# Altium PCB PCB1.PcbDoc
Units mil, origin at the board's own origin, x right, y up, seen from the top; angles counter-clockwise.
Board outline 750 x 510 mil, 2 copper layers (Top Layer, Bottom Layer); 9 components, 8 nets, 24 pads, 0 vias.
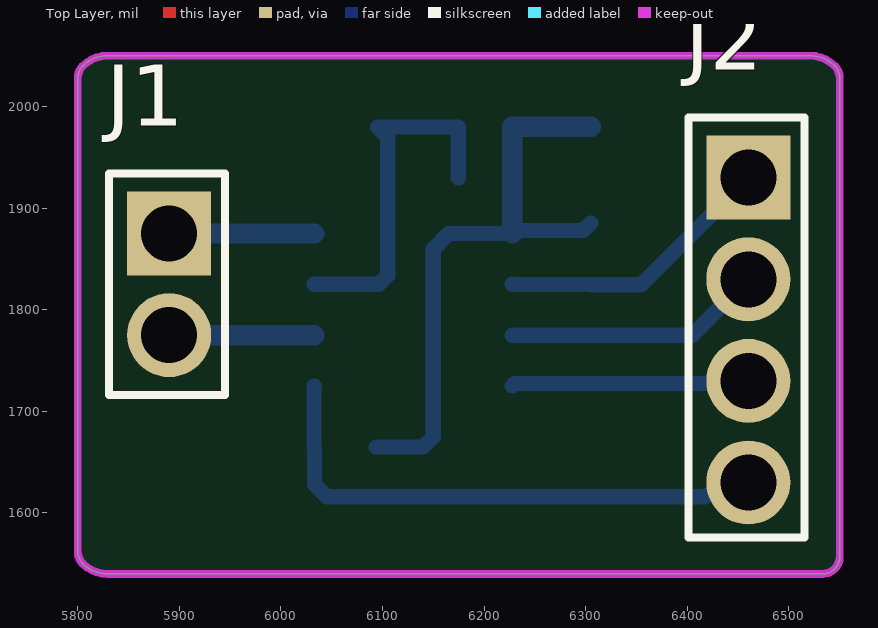
[diagram p0: Top Layer view]
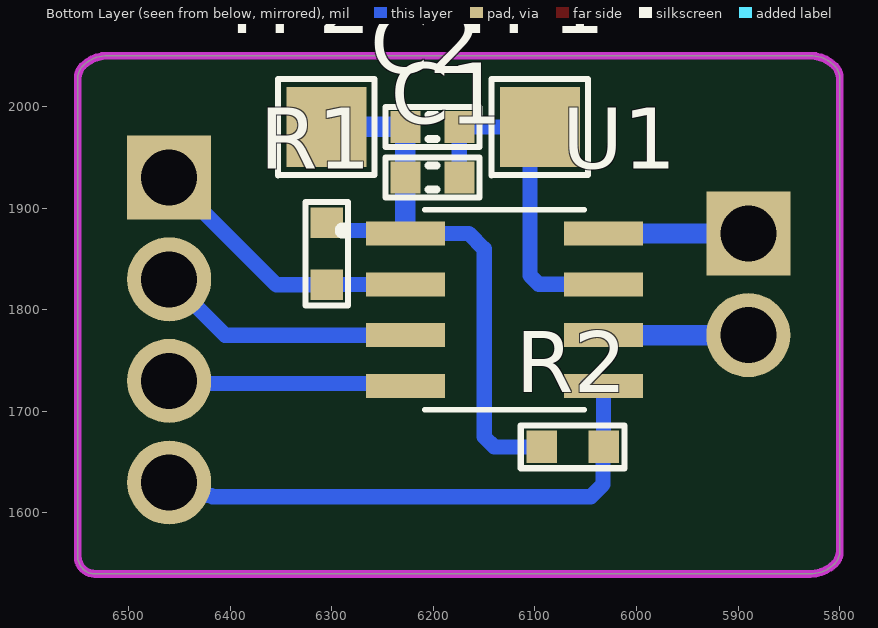
[diagram p1: Bottom Layer view, seen from below]
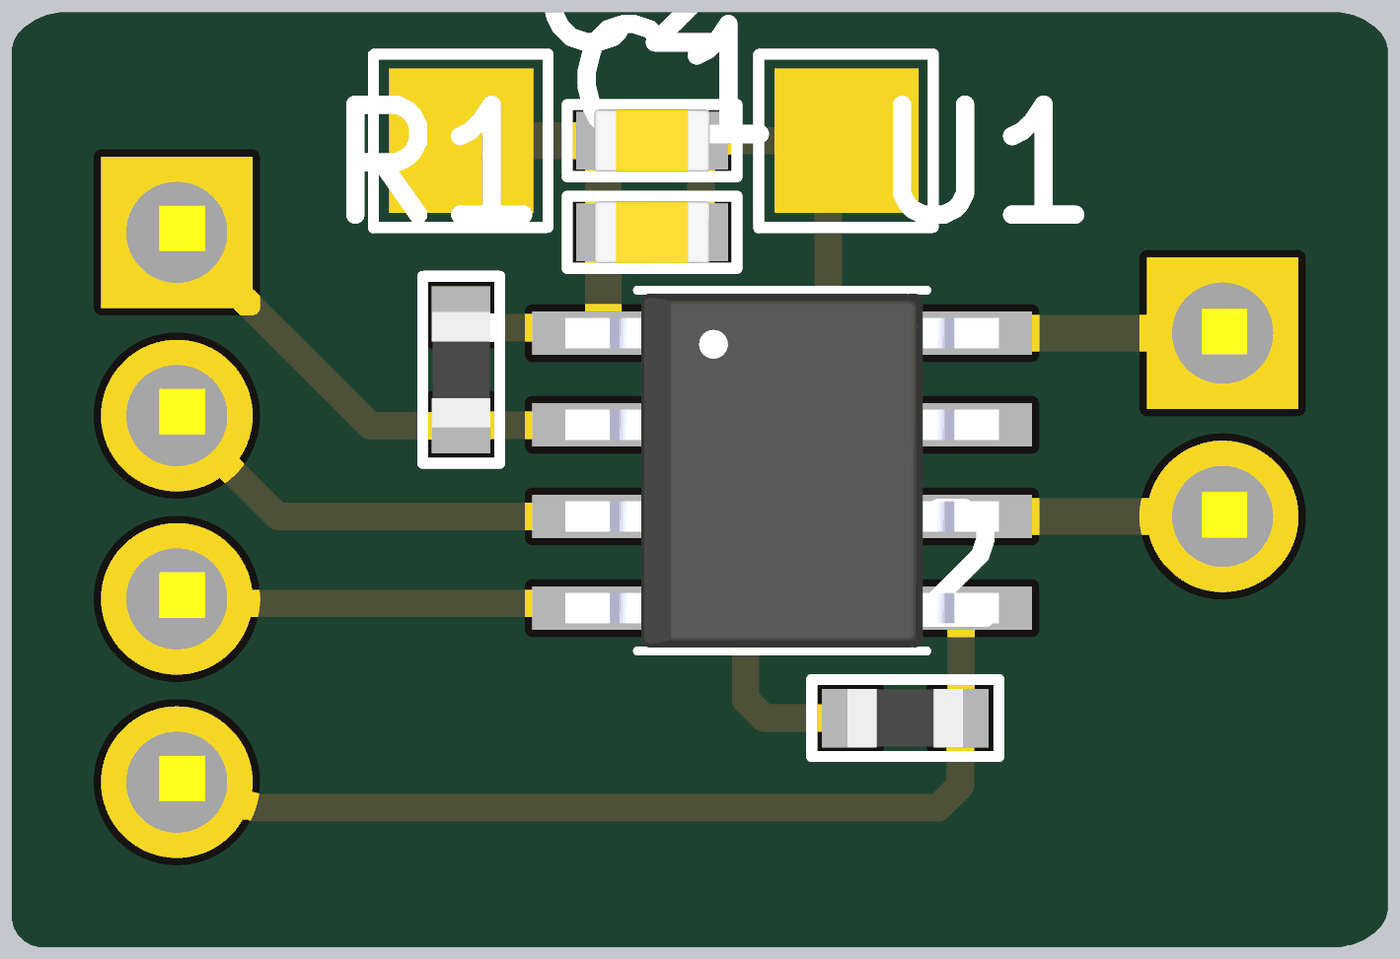
[diagram p2: 3D render of the assembled board from below, using the file's embedded part models]

## Layer stack, top to bottom
Top Solder: solder mask 0.4, Solder Resist, Dk 3.5
Top Layer: signal copper 1.4
Dielectric 1: dielectric 12.6, FR-4, Dk 4.8
Bottom Layer: signal copper 1.4
Bottom Solder: solder mask 0.4, Solder Resist, Dk 3.5

## Board outline
5800,1562.07 5800,2027.93 cw(c5817.07,2027.93) 5805,2040 cw(c5829.14,2015.86) 5829.14,2050 6520.86,2050 cw(c6520.86,2015.86) 6545,2040 cw(c6532.93,2027.93) 6550,2027.93 6550,1557.07 cw(c6532.93,1557.07) 6545,1545 cw(c6532.93,1557.07) 6532.93,1540 5829.14,1540 cw(c5829.14,1574.14) 5805,1550 cw(c5817.07,1562.07)

## Design rules (kind name [scope] priority, off if disabled: settings)
Clearance [All] p1: gap=15 ignorepadtopadclearanceinfootprint=FALSE
PolygonConnect [All] p1: connectstyle=Relief reliefconductorwidth=10 reliefentries=4 polygonreliefangle="90 Angle" airgapwidth=10
RoutingVias [All] p1: holewidth=28 width=50 viastyle="Through Hole" minholewidth=28 minwidth=50 maxholewidth=28 maxwidth=50
SolderMaskExpansion [All] p1: expansion=4 istentingtop=FALSE
SupplyNets "Schematic Supply Nets_1" [InNet('GND')] p1: voltage=0.000
SupplyNets "Schematic Supply Nets" [InNet('3V3')] p2: voltage=0.000
Width [All] p1: maxlimit=20 minlimit=10 preferedwidth=15
30 further rules are at their usual default settings.

## Components (designator, comment, footprint, x,y, rotation, side; value= is the part's Value field where it differs from the comment)
C1 "100nF/50V" CAP_0603 6200.98,1930 r0 bottom
C2 "10uF/16V" CAP_0603 6200.98,1980 r0 bottom
J1 "2.54mm_2P" Header_2.54mm_2P 5890,1875 r270 top
J2 "2.54mm_4P" Header_2.54mm_4P 6460,1930 r270 top
R1 "4.7K/1%/1_10W" Resistor_0603 6305,1855 r90 bottom
R2 "4.7K/1%/1_10W" Resistor_0603 6063,1665 r0 bottom
TP1 "Testpoint_SMD" TestPoint_Pad_2.0x2.0mm 6095,1980 r180 bottom
TP2 "Testpoint_SMD" TestPoint_Pad_2.0x2.0mm 6305,1980 r180 bottom
U1 "MCP4822-E/SN" SOIC-8 6130.12,1800 r180 bottom

## Footprints (in the part's own frame and the unit in brackets; to place one, negate y for a bottom-side part, rotate by r counter-clockwise, add the part's x,y. Pads: shape width x height; smd on the part's side, far side on the other; paste and mask are expansions set on the pad)
CAP_0603 [mm]
  rect 0.75x0.8 smd: 1(-0.675,0) 2(0.675,0)
  silkscreen extent -1.17,-0.5 1.17,0.5, body extent -0.8,-0.43 0.8,0.43, height 0.8
Header_2.54mm_2P [mm] "Vertical PCB Header, pitch 2.54mm, 2p"
  rect 2.1x2.1 hole 1.4: 1(0,0)
  round 2.1 hole 1.4: 2(2.54,0)
  silkscreen extent -1.5,-1.5 4.04,1.4, body extent -1.3,-1.27 3.78,1.22, height 12.01
Header_2.54mm_4P [mm] "Vertical PCB Header, pitch 2.54mm, 4p"
  rect 2.1x2.1 hole 1.4: 1(0,0)
  round 2.1 hole 1.4: 2(2.54,0) 3(5.08,0) 4(7.62,0)
  silkscreen extent -1.5,-1.5 9,1.4, body extent -1.32,-1.32 8.84,1.17, height 10.61
Resistor_0603 [mil]
  rect 30x32 smd: 1(-30.5,0) 2(30.5,0)
  silkscreen extent -51,-21 51,21, body extent -31,-16 31,16, height 28
SOIC-8 [mm]
  rect 1.97x0.6 smd: 1(-2.475,1.905) 2(-2.475,0.635) 3(-2.475,-0.635) 4(-2.475,-1.905) 5(2.475,-1.905) 6(2.475,-0.635) 7(2.475,0.635) 8(2.475,1.905)
  silkscreen extent -4.14,-2.5 2,2.5, body extent -3,-2.45 3,2.45, height 1.7
TestPoint_Pad_2.0x2.0mm [mm]
  rect 2x2 smd paste-2539.97 mask+0: 1(0,0)
  silkscreen extent -1.22,-1.21 1.2,1.2

## Part data
C1: library part Ceramic_Cap_100nF_50V_0603, "CAP, size 0603, 100nF, 50V", Supply Part Number="Tụ Gốm 0603 100nF (0.1uF) 50V", Supply Name=Thegioiic, Supply URL=https://www.thegioiic.com/tu-gom-0603-100nf-0-1uf-50v
C2: library part Ceramic_Cap_10uF_16V_0603, "CAP, size 0603, 10uF, 16V", Supply Part Number="Tụ Gốm 0603 10uF 16V", Supply Name=Thegioiic, Supply URL=https://www.thegioiic.com/tu-gom-0603-10uf-16v
J1: library part Header_2.54mm_2P, "Hàng Rào Đực Đơn 2.54mm 40 Chân 1 Hàng Cao 11.2mm Xuyên Lỗ", Supply Name=Thegioiic, Supply Part Number="Hàng Rào Đực Đơn 2.54mm 40 Chân 1 Hàng Cao 11.2mm Xuyên Lỗ", Supply URL=https://www.thegioiic.com/hang-rao-duc-don-2-54mm-40-chan-1-hang-cao-11-2mm-xuyen-lo
J2: library part Header_2.54mm_4P, "Hàng Rào Đực Đơn 2.54mm 40 Chân 1 Hàng Cao 11.2mm Xuyên Lỗ", Supply Name=Thegioiic, Supply Part Number="Hàng Rào Đực Đơn 2.54mm 40 Chân 1 Hàng Cao 11.2mm Xuyên Lỗ", Supply URL=https://www.thegioiic.com/hang-rao-duc-don-2-54mm-40-chan-1-hang-cao-11-2mm-xuyen-lo
R1 R2: library part Res_4.7K_0603_1%, "Resistor 0603 4.7KOhm 1% 1_10W", Supply Part Number="Điện Trở 4.7 KOhm 0603 1%", Supply Name=Thegioiic, Supply URL=https://www.thegioiic.com/dien-tro-4-7-kohm-0603-1-
U1: "12 Bit Digital to Analog Converter 2 8-SOIC", Supply Part Number="MCP4822-E/SN SOIC-8 DAC 12Bit Chính Hãng Microchip", datasheet=https://ww1.microchip.com/downloads/aemDocuments/documents/OTH/ProductDocuments/DataSheets/20002249B.pdf, Supply Name=BanLinhKien, Supply URL=https://banlinhkien.com/m4822esn-soic8-dac-12bit-chinh-hang-microchip-p6651182.html

## Nets (pads, with @x,y where several pads share a name; then routed paths per layer and width w, separated by ;. In a path a pad name is that pad's centre, name@x,y a point inside that pad or via, vN(x,y) a via of type N, cw(c..) or ccw(c..) an arc to the next point about the centre after c; other vN are vias at no path point)
3V3: C1.2 C2.2 R1.2 R2.2 TP2.1 U1.1 | length 593.6
  Bottom Layer w15: R2.2 6140,1665 6150,1675 6150,1860 6165.07,1875.07 6227.63,1875.07 6230.56,1878 6297.5,1878 R1.2
  Bottom Layer w20: U1.1 C1.2 C2.2 TP2.1
GND: C1.1 C2.1 TP1.1 U1.7 | length 355.7
  Bottom Layer w15: U1.7 6096.21,1825 6105,1833.79 6105,1970 TP1.1 C2.1 C1.1
NetJ1_1: J1.1 U1.8 | length 142.7
  Bottom Layer w20: J1.1 U1.8
NetJ1_2: J1.2 U1.6 | length 142.7
  Bottom Layer w20: J1.2 U1.6
NetJ2_1: J2.1 R1.1 U1.2 | length 276.3
  Bottom Layer w15: U1.2 6227.81,1824.75 6304.75,1824.75 R1.1 6354.5,1824.5 J2.1
NetJ2_2: J2.2 U1.3 | length 255.2
  Bottom Layer w15: U1.3 6405,1775 J2.2
NetJ2_3: J2.3 U1.4 | length 234.5
  Bottom Layer w15: U1.4 6230.06,1727.5 6457.5,1727.5 J2.3
NetJ2_4: J2.4 R2.1 U1.5 | length 535.1
  Bottom Layer w15: U1.5 6032.5,1724.82 R2.1 6033,1664.5 6033,1628 6045,1616 6417.37,1616 6418.43,1617.05 6447.05,1617.05 J2.4

## Keep-outs
Keep-Out Layer:
  lines w7.87: 5800,1562.07 ccw(c5817.07,1562.07) 5805,1550 ccw(c5829.14,1574.14) 5829.14,1540 6532.93,1540 ccw(c6532.93,1557.07) 6545,1545 ccw(c6532.93,1557.07) 6550,1557.07 6550,2027.93 ccw(c6532.93,2027.93) 6545,2040 ccw(c6520.86,2015.86) 6520.86,2050 5829.14,2050 ccw(c5829.14,2015.86) 5805,2040 ccw(c5817.07,2027.93) 5800,2027.93 5800,2010 5800,1562.07